# EAGLE board soundfield_board_40720_20mm (EAGLE 8.0.2)
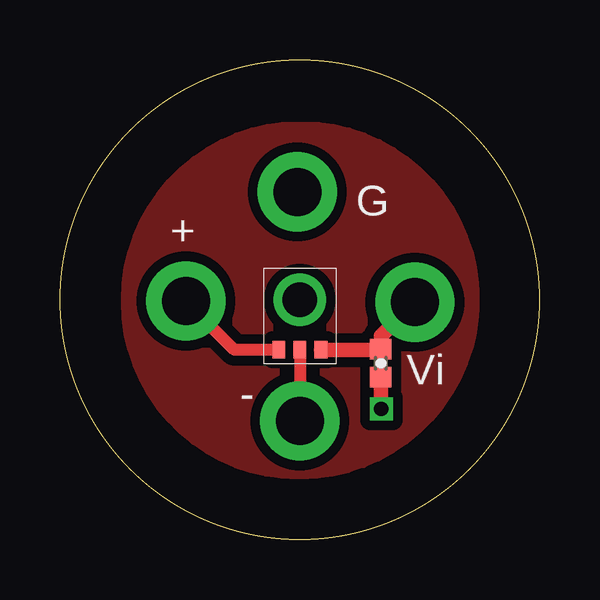
[diagram p0: board, top side]
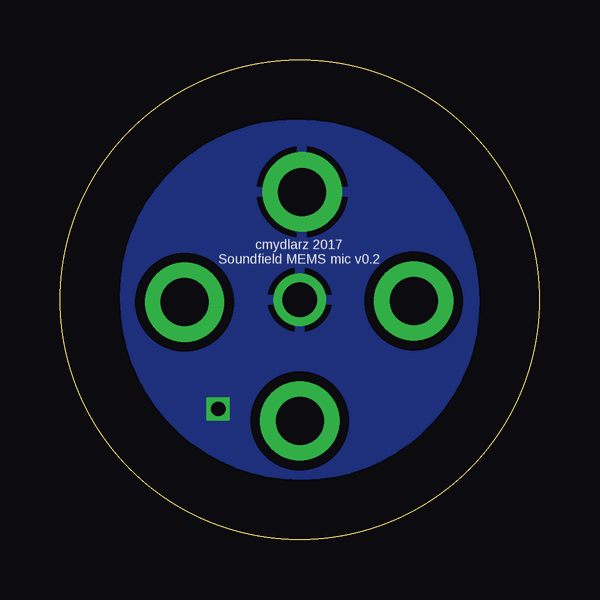
[diagram p1: board, bottom side, seen from below]

Size 20 x 20 mm. Coordinates in mm from the lower left corner, seen from the top.
Outline: circle at 10,10 radius 10
Copper layers (1*16): Top 0.0356mm / dielectric 1.5011mm / Bottom 0.0356mm
Design rules "oshpark-2layer *": minimum track width 6mil, minimum drill 13mil, track to track 6mil, track to pad 6mil, pad to pad 6mil, via to via 6mil, smd to smd 6mil, copper to edge 15mil, drill to drill 6mil, minimum pad ring 7mil, minimum via ring 7mil, stop-mask expansion 0mil, vias tented up to drill 20mil, thermal gap 10mil
Net classes: 0 default: clearance 0.205 mm

## Footprints (pad centres in the part's own frame; a part is rotated, then mirrored left to right if it is on the bottom)
0402-CAP = smd 0.85 x 0.9: 1 -0.58,0; 2 0.58,0
1X01_NO_SILK = drill 1.45 pad 2.14: 1 0,0
1X01_2MM = drill 2 pad 3.302: 1 0,0
 MEMS_ICS_40720 = smd 2.14 x 2.14: GND 1.5,2.68 | smd 0.53 x 0.73: VDD 2.385,0.595; VOUT+ 0.625,0.595; VOUT- 1.505,0.595

## Placement (x,y rotation side)
C1  [0402-CAP]  13.38,7.35 270 top
GND  [1X01_NO_SILK]  10,10 0 top
GND_IN  [1X01_2MM]  9.9,14.5 270 top
U$1  MEMS_ICS_40720  [ MEMS_ICS_40720]  8.5,7.32 0 top
VDD  [1X01_2MM]  14.8,9.9 0 top
VOUT+  [1X01_2MM]  5.25,9.95 270 top
VOUT-  [1X01_2MM]  10,4.95 0 top

## Library data of the parts
C1 = SparkFun-Capacitors; PROD_ID: CAP-12416
GND = CM-SparkFun-Connectors-large_hole
GND_IN = CM-SparkFun-Connectors-2
U$1 = mems_ICS_40720
VDD VOUT+ VOUT- = CM-SparkFun-Connectors

## Nets
GND: C1.2 GND.1 GND_IN.1 U$1.GND
VDD: C1.1 U$1.VDD VDD.1
VOUT+: U$1.VOUT+ VOUT+.1
VOUT-: U$1.VOUT- VOUT-.1

## Tracks (layer width: path | path; a pad name or v marks a point on that pad's centre or on a via)
GND  (via drill 0.6)
  Top 0.61: C1.2 13.38,5.57 13.4,5.55 v13.4,5.45
  pour Bottom (isolate 0.406): 17.3,10.05 arc-90 9.95,2.7 9.9,2.7 arc-90 2.7,9.9 2.7,9.95 arc-90 10.05,17.3 10.15,17.3 10.2,17.3 arc-90 17.3,10.2
N$1
  pour Top (isolate 0.406): 2.75,10 arc-90 10,17.25 10.05,17.25 arc-90 17.3,10 arc-90 10,2.7 9.95,2.7 arc-90 2.75,9.9
VDD
  Top 0.61: U$1.VDD 13.37,7.92 C1.1 13.38,8.48 VDD.1
VOUT+
  Top 0.305: 8.88,7.92 U$1.VOUT+
  Top 0.5: U$1.VOUT+ 7.29,7.92 VOUT+.1
VOUT-
  Top 0.406: U$1.VOUT-
  Top 0.5: U$1.VOUT- VOUT-.1

## Text on the board
tNames: G | + | Vi | -
bNames: cmydlarz 2017 / Soundfield MEMS mic v0.2